# Altium PCB 48-17V Buck Converter.PcbDoc
Units mil, origin at the board's own origin, x right, y up, seen from the top; angles counter-clockwise.
Board outline 2099.53 x 1497.31 mil, 4 copper layers (TOP, GNG, GND, BOT), stack 64.961 mil thick; 34 components, 13 nets, 97 pads, 83 vias.
Unrouted connection lines stored in the file: 4.
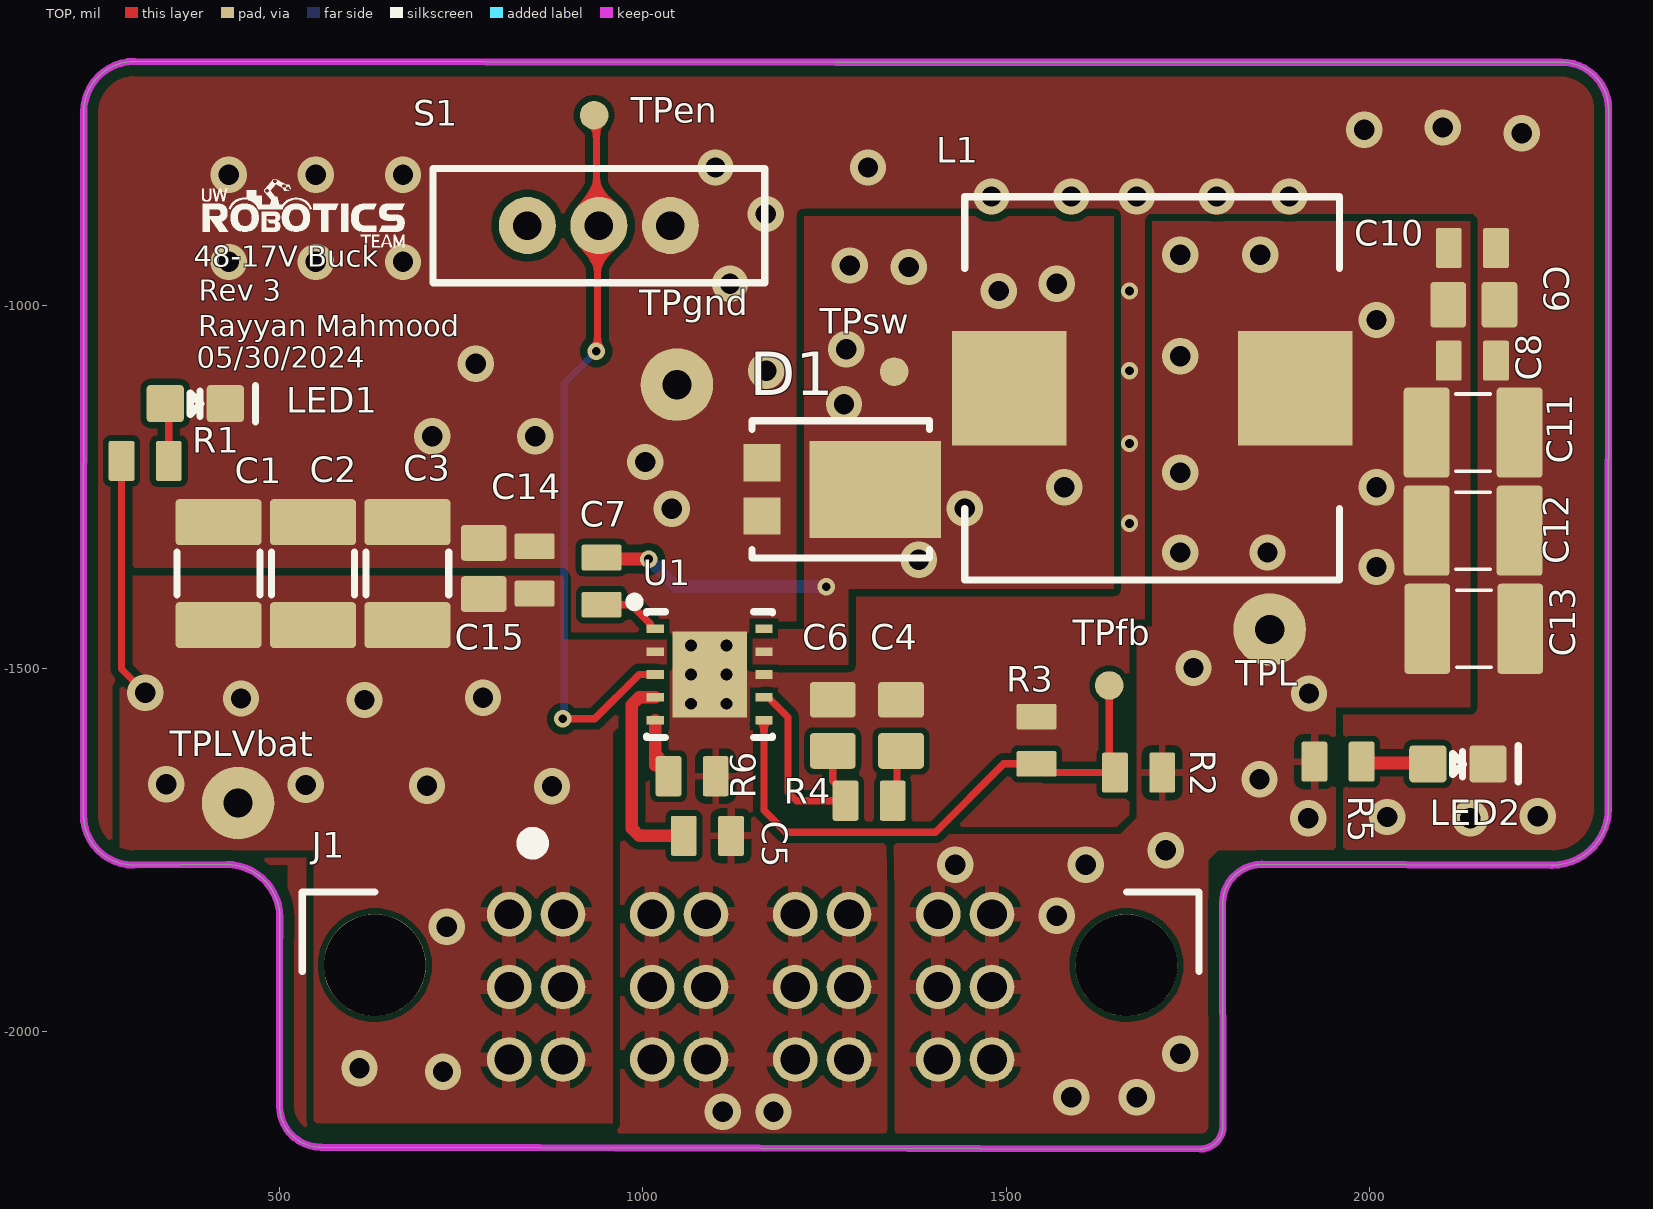
[diagram p0: TOP view]
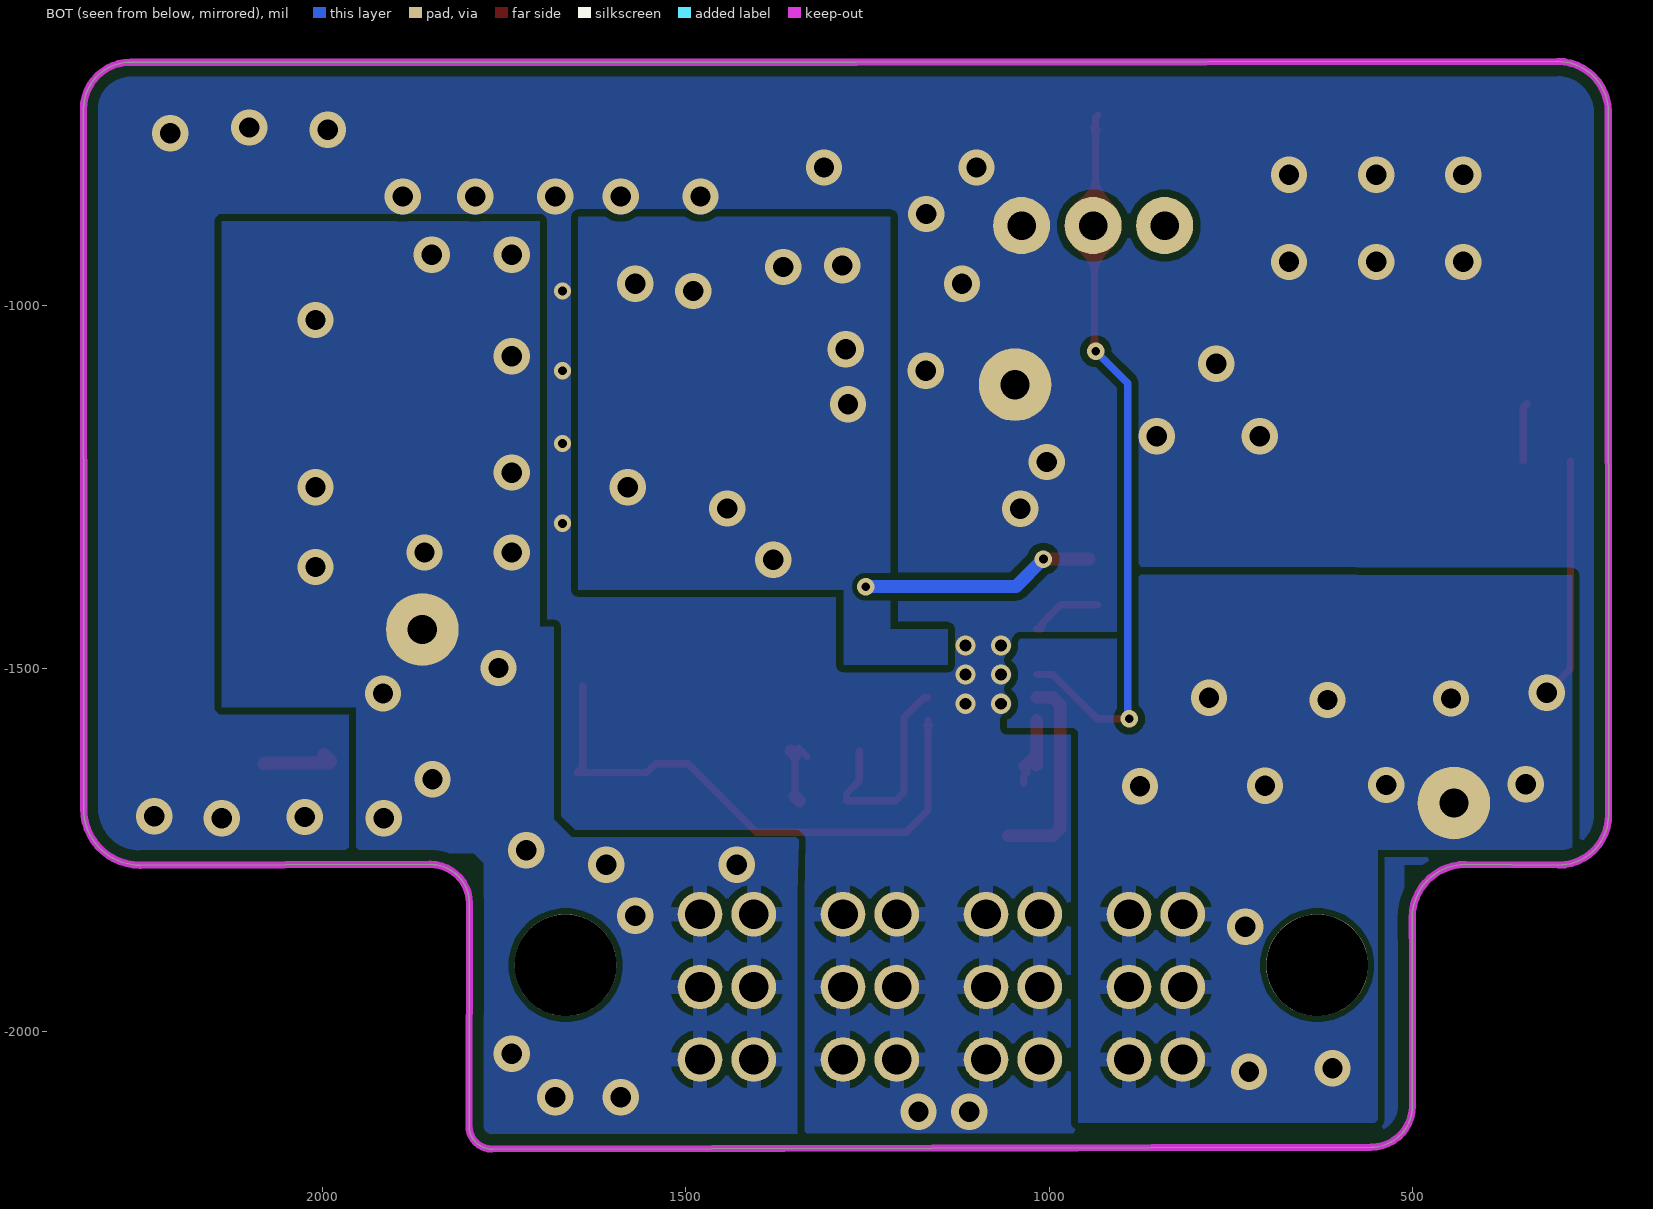
[diagram p1: BOT view, seen from below]
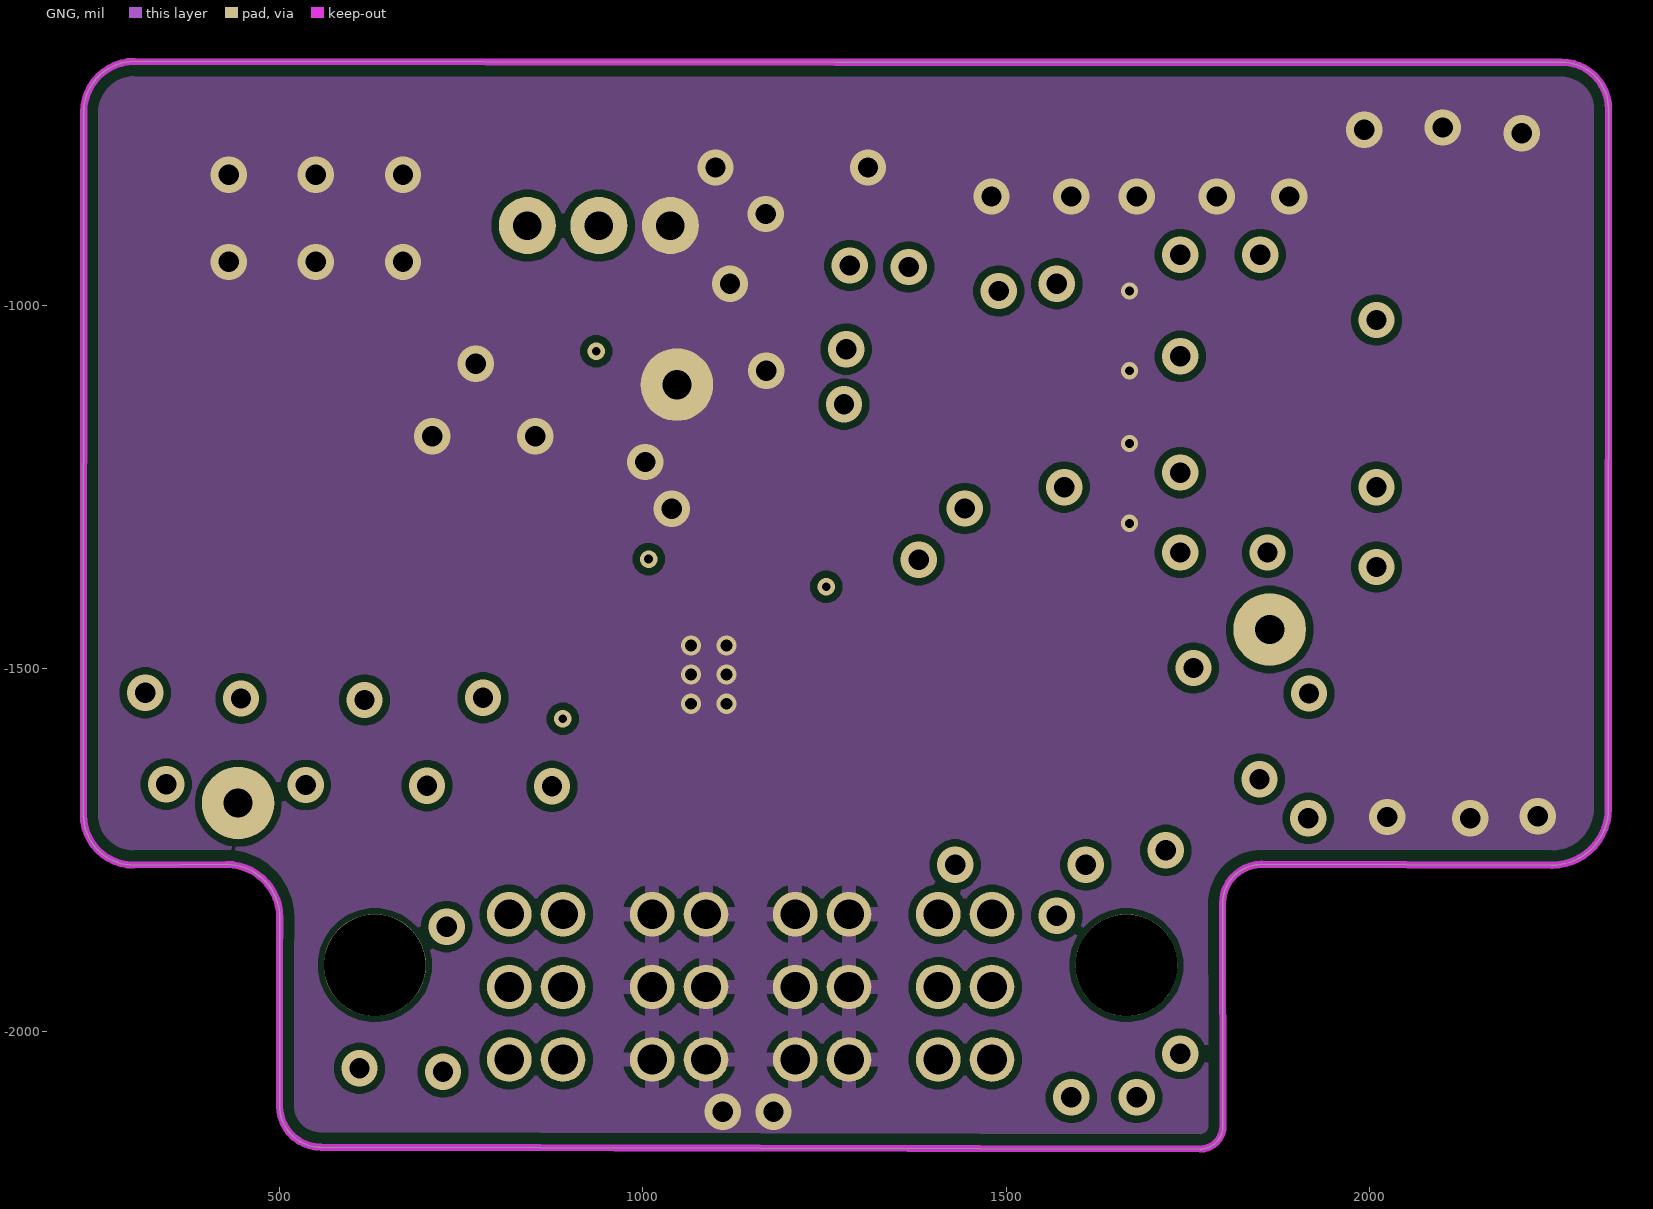
[diagram p2: GNG]
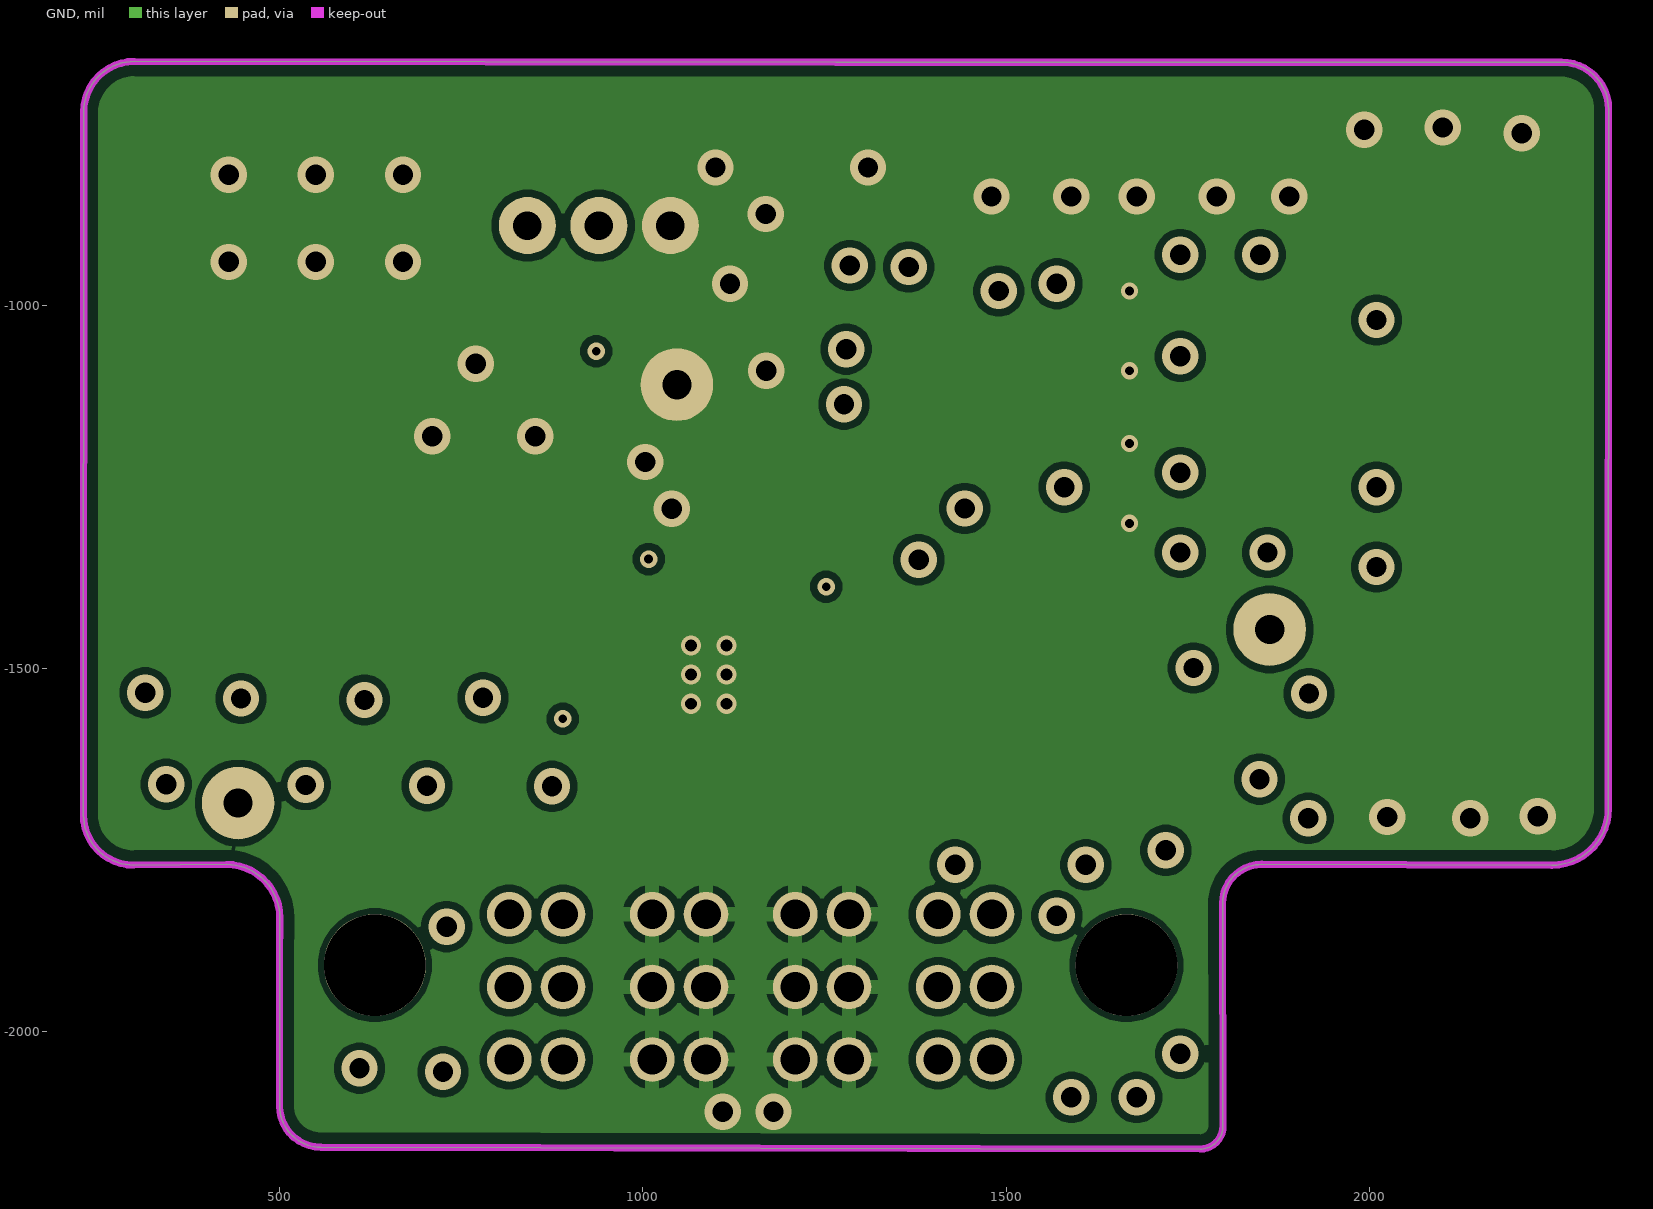
[diagram p3: GND]
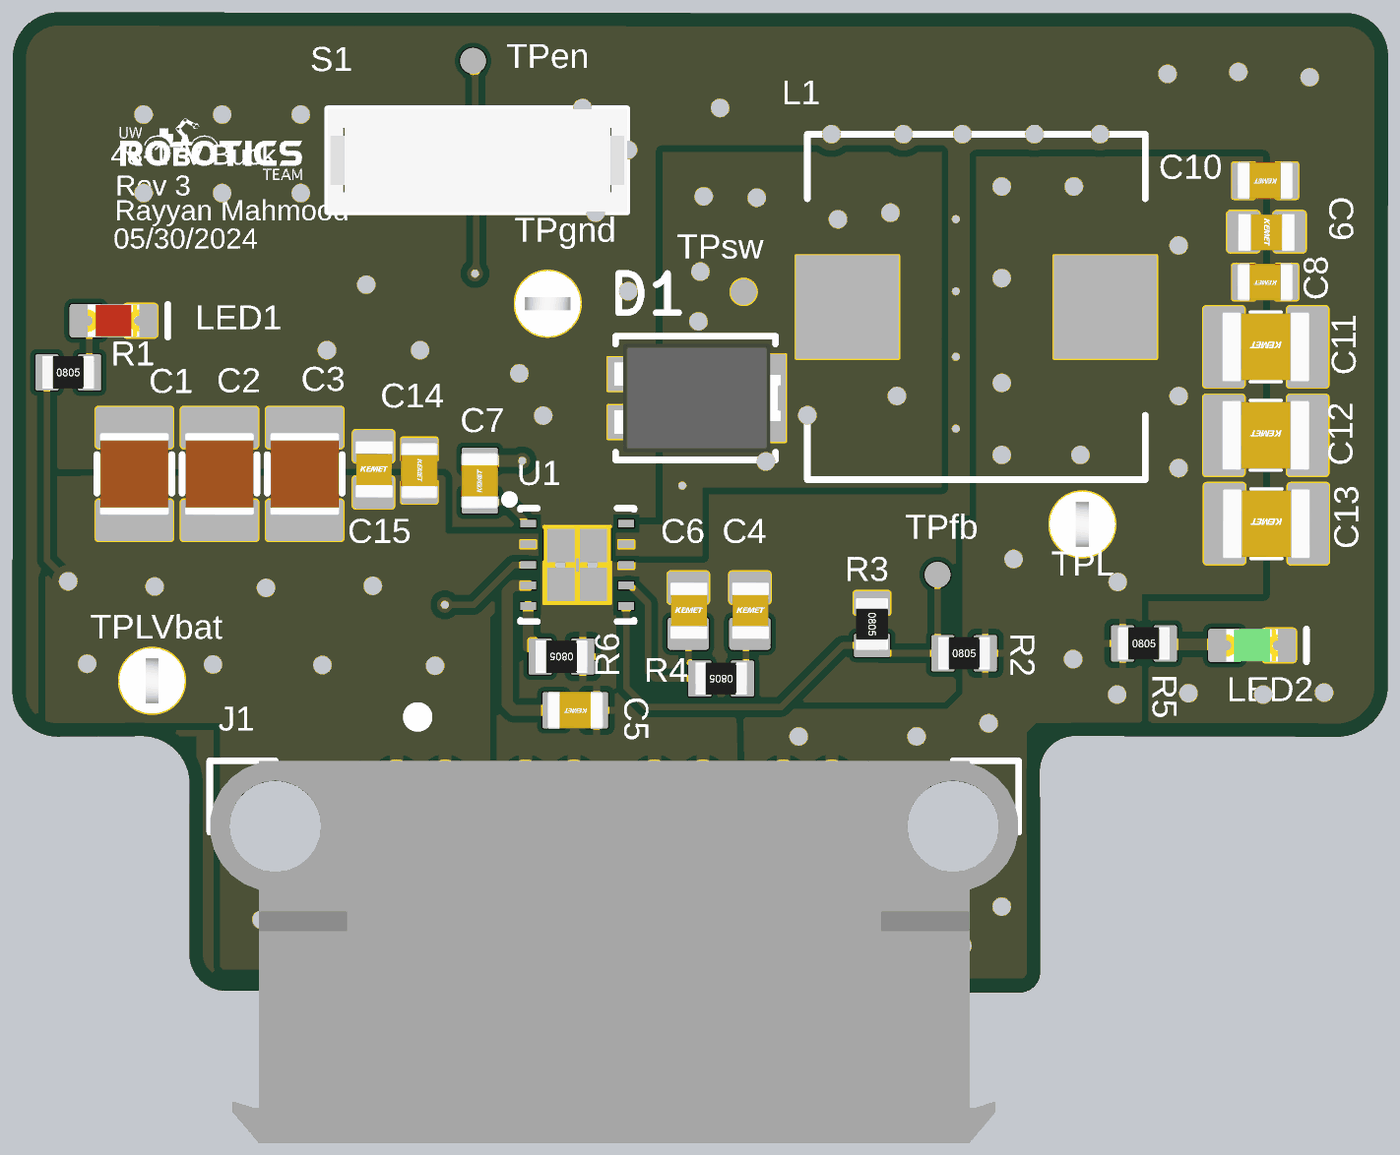
[diagram p4: 3D render of the assembled board from above, using the file's embedded part models]

## Layer stack, top to bottom
Top Solder: solder mask 0.5, Solder Resist, Dk 3.8
TOP: signal copper 2.953
Dielectric 1: prepreg 7.874, 7628, Dk 4.6
GNG: signal copper 0.689
Core: core 41.929, FR-4, Dk 4.5
GND: signal copper 0.689
Dielectric 2: prepreg 7.874, 7628, Dk 4.6
BOT: signal copper 2.953
Bottom Solder: solder mask 0.5, Solder Resist, Dk 3.8

## Board outline
500,-2101.78 499.99,-1902.13 500.37,-1842.77 ccw(c427.08,-1842.77) 427.08,-1769.47 299.13,-1770.32 cw(c299.13,-1701.17) 229.98,-1701.17 230.35,-733.79 cw(c300.16,-733.79) 300.16,-663.98 1265.75,-665 2264.61,-665 cw(c2264.61,-729.9) 2329.51,-729.9 2329.21,-1692.66 cw(c2251.4,-1692.66) 2251.4,-1770.48 1851.97,-1769.32 ccw(c1851.97,-1823.16) 1798.13,-1823.16 1798.7,-2129.43 cw(c1767.09,-2129.68) 1767.09,-2161.29 556.97,-2158.75 cw(c556.97,-2101.78)

## Design rules (kind name [scope] priority, off if disabled: settings)
BoardOutlineClearance [All] p1: gap=20 ignorepadtopadclearanceinfootprint=FALSE except(5: Text-OutlineEdge Text-CavityEdge Text-CutoutEdge Text-SplitBarrior Text-SplitContinuation; 25: Track-OutlineEdge Track-CavityEdge Track-CutoutEdge Track-SplitBarrior Track-SplitContinuation)
Clearance "High Voltage Internal" [InNetClass('High_Voltage_Internal')  and OnLayer('Power')] p1: gap=20 ignorepadtopadclearanceinfootprint=TRUE
Clearance "High Voltage External" [InNetClass('High_Voltage')  and OnLayer('Signal')] p2: gap=12 ignorepadtopadclearanceinfootprint=TRUE
Clearance Clearance_1 [All] p3: gap=10 ignorepadtopadclearanceinfootprint=TRUE except(0: Arc-Text Track-Text Text-Hole; 5: Track-Track SMDPad-SMDPad Text-Text; 7: SMDPad-Region; 8: Arc-Arc Arc-Track Arc-SMDPad Arc-Hole Track-SMDPad Track-Region Track-Hole SMDPad-THPad SMDPad-Fill SMDPad-Poly SMDPad-Text SMDPad-Hole THPad-Hole Via-Hole Fill-Hole Poly-Hole Region-Region Region-Hole; 20: THPad-THPad Via-Via)
ComponentClearance [All] p1: gap=10 collisioncheckmode=3 verticalgap=200 showdistances=FALSE
DiffPairsRouting [All] p1: maxlimit=10 minlimit=8 mostfreqgap=10 toplayer_minwidth=10 toplayer_maxwidth=10 toplayer_prefwidth=10 midlayer1_minwidth=10 midlayer1_maxwidth=10 midlayer1_prefwidth=10 midlayer2_minwidth=10 midlayer2_maxwidth=10 midlayer2_prefwidth=10 bottomlayer_minwidth=10 bottomlayer_maxwidth=10 bottomlayer_prefwidth=10 maxuncoupledlength=500
Height [All] p1: minheight=0 maxheight=50000 prefheight=500
HoleSize [All] p1: absolutevalues=TRUE maxlimit=200 minlimit=10 maxpercent=80.000 minpercent=20.000
HoleToHoleClearance [All] p1: gap=20 allowstackedmicrovias=TRUE
MinimumAnnularRing [All] p1: minimumring=5
MinimumSolderMaskSliver [All] p1: minsoldermaskwidth=3
PlaneConnect PlaneConnect_highpwr [(InNet('24V') OR InNet('VBAT'))] p1: planeconnectstyle=Direct reliefexpansion=20 reliefentries=4 reliefconductorwidth=10 reliefairgap=10
PlaneConnect PlaneConnect_GNDCON [(InNet('GND') AND (InComponent('J1') OR InComponent('J2')))] p2: planeconnectstyle=Direct reliefexpansion=20 reliefentries=4 reliefconductorwidth=10 reliefairgap=10
PlaneConnect [All] p3: pad.planeconnectstyle=Relief pad.reliefexpansion=20 pad.reliefentries=4 pad.reliefconductorwidth=10 pad.reliefairgap=10 via.planeconnectstyle=Direct via.reliefexpansion=20 via.reliefentries=4 via.reliefconductorwidth=10 via.reliefairgap=10
PolygonConnect PolygonConnect_DIRECT_COMPONENTS [(     InComponent('C1') OR     InComponent('C2') OR     InComponent('C3') OR     InComponent('C14') OR     InComponent('C15') OR     InComponent('C7') OR     (         InComponent('C10') OR         InComponent('C9') OR         InComponent('C11') OR         (             InComponent('C8') OR             InComponent('C12') OR             InComponent('C13') OR             InComponent('R4') OR             InComponent('C6') OR             InComponent('C4') OR             InComponent('R3')         )     ) )] p1: connectstyle=Direct reliefconductorwidth=10 reliefentries=4 polygonreliefangle="90 Angle" airgapwidth=10
PolygonConnect "Connector Relief" [InComponent('J1')] p2: connectstyle=Relief reliefconductorwidth=20 reliefentries=4 polygonreliefangle="90 Angle" airgapwidth=10
PolygonConnect PolygonConnect_Via [IsVia] p3: connectstyle=Direct reliefconductorwidth=10 reliefentries=4 polygonreliefangle="90 Angle" airgapwidth=10
PolygonConnect PolygonConnect_SMALL_Relief [(HasFootprint('CAP0805') OR HasFootprint('CAP0603') OR HasFootprint('RES0603') OR HasFootprint('RES0805') OR HasFootprint('CAP2012') OR HasFootprint('SOD-923') OR HasFootprint('SOD-128'))] p4: connectstyle=Relief reliefconductorwidth=10 reliefentries=4 polygonreliefangle="90 Angle" airgapwidth=10
PolygonConnect [All] p5: connectstyle=Direct reliefconductorwidth=10 reliefentries=4 polygonreliefangle="90 Angle" airgapwidth=10
RoutingVias [All] p1: holewidth=12 width=24 viastyle="Through Hole" minholewidth=6 minwidth=12 maxholewidth=24 maxwidth=50
SilkToSilkClearance [All] p1: silktosilkclearance=2
SilkToSolderMaskClearance [IsPad] p1: minsilkscreentomaskgap=0.5 clearancetoexposedcopper=TRUE
SolderMaskExpansion [All] p1: expansion=2 istentingtop=FALSE
SupplyNets "Schematic Supply Nets_2" [InNet('GND')] p1: voltage=0.000
SupplyNets "Schematic Supply Nets_1" [InNet('VBAT')] p2: voltage=0.000
SupplyNets "Schematic Supply Nets" [InNet('17V')] p3: voltage=0.000
Width Width_1 [All] p1: maxlimit=100 minlimit=5 preferedwidth=10 midlayer1_maxwidth=10 minimp=50.000000 maximp=50.000000 favimp=50.000000
21 further rules are at their usual default settings.

## Components (designator, comment, footprint, x,y, rotation, side; value= is the part's Value field where it differs from the comment)
C1 "CAP_2.2uF_100V_1210_1" CAPC3225X270N 416,-1369 r270 top value=2.2μF
C2 "CAP_2.2uF_100V_1210_1" CAPC3225X270N 546,-1369 r270 top value=2.2μF
C3 "CAP_2.2uF_100V_1210_1" CAPC3225X270N 676,-1369 r270 top value=2.2μF
C4 "CAP_22nF_50V_0805 +/- 1%" CAP2012 1355.53,-1577.87 r270 top value=22nF
C5 "CAP_2.7nF_50V_0805" CAP0805 1089,-1730 r180 top value=2.7nF
C6 "CAP_220pF_50V_0805_2_1" CAP2012 1261.53,-1577.87 r270 top value=220pF
C7 "CAP_100nF_50V_0805" CAP0805 943.28,-1379.41 r90 top value=100nF
C8 "CAP_0.1uF_100V_0805" CAP0805 2142,-1076 r180 top value=0.1µF
C9 "CAP_1uF_50V_0805" CAP2012 2144,-999 r180 top value=1μF
C10 "CAP_4.7uF_50V_0805" CAP0805 2142,-921 r180 top value=4.7μF
C11 "CAP_22uF_100V_1210" CAP1210 2143,-1175 r180 top value=22μF
C12 "CAP_22uF_100V_1210" CAP1210 2143,-1310 r180 top value=22μF
C13 "CAP_22uF_100V_1210" CAP1210 2144,-1445 r180 top value=22μF
C14 "CAP_0.1uF_100V_0805" CAP0805 851,-1364 r270 top value=0.1µF
C15 "CAP_1uF_50V_0805" CAP2012 781,-1362 r270 top value=1μF
D1 "8A" TO-277 1209.54,-1253.15 r270 top
J1 "CON_2POS_SCREW_TERM" MPT-04-01-01-L-RA-SD 1148.42,-2150.2 r0 top
L1 "IND_22uH_6.3A" IND_22uH_6.3A 1701.15,-1114 r0 top
LED1 "LED_RED" LED_0805_RED 384,-1135 r0 top
LED2 "LED_GREEN" LED_0805_GREEN 2122,-1631 r0 top
R1 "RES_6.04kΩ_0805_1%" RES0805 315,-1214 r0 top value=6.04kΩ
R2 "RES_243kΩ_0805_1%_1" RES0805 1682.48,-1643 r0 top value=243kΩ
R3 "RES_12kΩ_0805_1%" RES0805 1542,-1598.48 r270 top value=12kΩ
R4 "RES_9.76kΩ_0805_1%" RES0805 1311.63,-1681.73 r180 top value=9.76kΩ
R5 "RES_2KΩ_0805_1%" RES0805 1957,-1628 r0 top value=2kΩ
R6 "RES_205kΩ_0805_1%" RES0805 1068,-1648 r180 top value=205kΩ
S1 "SW_SLIDE_TOGGLE" SW_SLIDE_TOGGLE 939.57,-890 r180 top
TPen "TESTPOINT_1MM_CIRCLE" TESTPOINT_CIRCLE_1MM 933,-738 r90 top
TPfb "TESTPOINT_1MM_CIRCLE" TESTPOINT_CIRCLE_1MM 1642,-1523 r90 top
TPgnd "TESTPOINT_LOOP" TESTPOINT_LOOP 1047,-1109 r0 top
TPL "TESTPOINT_LOOP" TESTPOINT_LOOP 1863,-1446 r90 top
TPLVbat "TESTPOINT_LOOP" TESTPOINT_LOOP 443,-1685 r90 top (schematic designator TPLVBAT)
TPsw "TESTPOINT_1MM_CIRCLE" TESTPOINT_CIRCLE_1MM 1346,-1091 r90 top
U1 "TPS54561" BUCK_TPS54561DPRR 1092,-1508 r0 top locked

## Footprints (in the part's own frame and the unit in brackets; to place one, negate y for a bottom-side part, rotate by r counter-clockwise, add the part's x,y. Pads: shape width x height; smd on the part's side, far side on the other; paste and mask are expansions set on the pad)
BUCK_TPS54561DPRR [mm] "Buck Switching Regulator IC Positive Adjustable 0.8V 1 Output 5A 10-WDFN Exposed Pad"
  rect 0.6x0.3 smd: 1(-1.9,1.6) 2(-1.9,0.8) 3(-1.9,0) 4(-1.9,-0.8) 5(-1.9,-1.6) 6(1.9,-1.6) 7(1.9,-0.8) 8(1.9,0) 9(1.9,0.8) 10(1.9,1.6)
  rect 2.6x3 smd paste-1.245: 11(0,0)
  silkscreen extent -2.7,-2.2 2.2,2.61, body extent -2.05,-2.05 2.05,2.05, height 0.8
CAP0805 [mm] "Chip Capacitor, Body 2.0x1.2mm, Height 0.45mm, IPC Medium Density"
  rrect15% 0.9x1.4 smd: 1(-0.825,0) 2(0.825,0)
  body extent -1.1,-0.73 1.1,0.73, height 1.39
CAP1210 [mm]
  rrect15% 1.6x3.15 smd: 1(-1.625,0) 2(1.625,0)
  silkscreen extent -0.6,-1.35 0.6,1.35, body extent -1.7,-1.35 1.7,1.35, height 2.1
CAP2012 [mm]
  rrect20% 1.25x1.6 smd: 1(-0.895,0) 2(0.895,0)
  body extent -1.1,-0.7 1.1,0.75, height 1.41
CAPC3225X270N [mm]
  rrect15% 1.6x3 smd: 1(-1.8,0) 2(1.8,0)
  silkscreen extent -0.75,-1.45 0.75,1.45, body extent -1.6,-1.35 1.6,1.35, height 2.55
IND_22uH_6.3A [mm] "Precision Wire Wound Inductor, 2-Leads, Body 13.10x13.40mm, IPC Medium Density"
  rect 4x4 smd: 1(-5,0) 2(5,0)
  silkscreen extent -6.55,-6.7 6.55,6.7, body extent -6.55,-6.7 6.55,6.7, height 3.7
LED_0805_GREEN [mm] "SMD, 2-Leads, Body 2x1.25mm"
  rrect20% 1.3x1.3 smd: 1(-1.05,0) 2(1.05,0)
  silkscreen extent -0.18,-0.64 2.11,0.64, body extent -1,-0.62 1,0.63, height 1.12
LED_0805_RED [mm] "SMD, 2-Leads, Body 2x1.25mm"
  rrect20% 1.3x1.3 smd: 1(-1.05,0) 2(1.05,0)
  silkscreen extent -0.18,-0.64 2.11,0.64, body extent -1,-0.62 1,0.63, height 1.12
MPT-04-01-01-L-RA-SD [mm]
  round 1.56 hole 1.04 paste-2539.97: 1(-8.44,2.85) 1(-6.56,2.85) 2(-3.44,2.85) 2(-1.56,2.85) 3(1.56,2.85) 3(3.44,2.85) 4(6.56,2.85) 4(8.44,2.85)
  round 1.56 hole 1.04: 1(-8.44,5.39) 1(-8.44,7.93) 1(-6.56,5.39) 1(-6.56,7.93) 2(-3.44,5.39) 2(-3.44,7.93) 2(-1.56,5.39) 2(-1.56,7.93) 3(1.56,5.39) 3(1.56,7.93) 3(3.44,5.39) 4(6.56,5.39) 4(6.56,7.93) 4(8.44,5.39) 4(8.44,7.93)
  round 1.56 hole 1.04 mask+0.051: 3(3.44,7.93)
  round 3.56 hole 3.56 unplated: ""(-13.14,6.15) ""(13.14,6.15)
  silkscreen extent -15.68,5.94 15.68,10.67, body extent -15.68,-6.1 15.68,8.71, height 10.89
RES0805 [mm] "Chip Resistor, 2-Leads, Body 2.00x1.25mm, IPC High Density"
  rrect15% 0.9x1.4 smd: 1(-0.825,0) 2(0.825,0)
  body extent -1,-0.62 1,0.63, height 0.61
SW_SLIDE_TOGGLE [mm]
  round 2 hole 1: 1(-2.5,0) 2(0,0) 3(2.5,0)
  silkscreen extent -5.8,-2 5.8,2, body extent -5.8,-2 5.8,2, height 7
TESTPOINT_CIRCLE_1MM [mm]
  round 1 smd: 1(0,0)
TESTPOINT_LOOP [mm]
  round 2.54 hole 1.02: 1(0,0)
  body extent -1.27,-1.27 1.27,1.27, height 4.57
TO-277 [mm]
  rect 1.3x1.3 smd: 1(0.93,-1.15) 3(-0.93,-1.15)
  rect 3.4x4.6 smd: 2(0,2.8)
  silkscreen extent -2.4,-1.5 2.4,4.7, body extent -2.1,-1.55 2.1,4.9, height 1.2

## Part data
C1 C2 C3: "CAP CER 2.2UF 100V X7R 1210", Manufacturer 1="TDK Corporation", Manufacturer Part Number 1=C3225X7R2A225K230AB, Package/Footprint=1210, Supplier Part Number 1=445-4497-1-ND, Voltage Rating=100V, Mounting Type=SMD, Supplier 1=Digi-Key
C4: "CAP CER 22nF 50V 0805", Manufacturer 1="Murata Electronics", Manufacturer Part Number 1=GCM21B5C1H223FA16L, Package=0805, Supplier Part Number 1=490-GCM21B5C1H223FA16LCT-ND, Voltage Rating=50V, Mounting Type=SMD, Supplier 1=Digi-Key
C5: "CAP CER 2700PF 50V C0G 0805", Manufacturer 1="TDK Corporation", Manufacturer Part Number 1=C2012C0G1H272J060AA, Package/Footprint=0805, Supplier Part Number 1=445-7508-1-ND, Voltage Rating=50V, Supplier 1=Digi-Key
C6: "CAP CER 220pF 50V 0805 +/-1%", Manufacturer 1=YAGEO, Manufacturer Part Number 1=CC0805FRNPO9BN221, Package=0805, Supplier Part Number 1=311-4172-1-ND, Voltage Rating=50V, Mounting Type=SMD, Supplier 1=Digi-Key
C7: "CAP CER 0.1UF 50V X7R 0805", Manufacturer 1="Samsung Electro-Mechanics", Manufacturer Part Number 1=CL21B104KBCNNNC, Package/Footprint=0805, Supplier Part Number 1=1276-1003-1-ND, Voltage Rating=50V, Supplier 1=Digi-Key
C8 C14: "CAP CER 0.1UF 100V X7R 0805", Manufacturer 1="TDK Corporation", Manufacturer Part Number 1=C2012X7R2A104K125AA, Package=0805, Supplier Part Number 1=445-1418-1-ND, Voltage Rating=100V, Supplier 1=Digi-Key
C9 C15: "CAP CER 1UF 50V X7R 0805", LCSC Part #=C28323, Manufacturer 1="Samsung Electro-Mechanics", Manufacturer Part Number 1=CL21B105KBFNNNG, Package=0805, Supplier Part Number 1=1276-6470-1-ND, Voltage Rating=50V, Mounting Type=SMD, Supplier 1=Digi-Key
C10: "CAP CER 4.7UF 50V X5R 0805", Dielectric=X5R, LCSC Part #=C1779, Manufacturer 1="TDK Corporation", Manufacturer Part Number 1=CGA4J3X5R1H475K125AB, Package=0805, Supplier Part Number 1=445-7882-1-ND, Voltage Rating=50V, Mounting Type=SMD, Supplier 1=Digi-Key
C11 C12 C13: "CAP CER 22UF 35V X5R 1210", Manufacturer 1="Taiyo Yuden", Manufacturer Part Number 1=GMK325BJ226MM-T, Package/Footprint=1210, Supplier Part Number 1=587-6141-1-ND, Voltage Rating=35V, Mounting Type=SMD, Supplier 1=Digi-Key
D1: library part DIO_SCHOTTKY_100V_8A, "Diode 100 V 8A Surface Mount TO-277", Manufacturer 1=GSGC151BS, Manufacturer Part Number 1="Good-Ark Semiconductor", Package/Footprint=T0-277, Supplier Part Number 1=4786-GSGC151BSTR-ND, Mounting Type=SMD, Supplier 1=Digikey, Vr (Max)=100V
J1: library part CON_4POS_POWERBLADE_MALE, "CONN HDR 4POS 5MM R/A SLDR", Manufacturer 1="Samtec Inc.", Manufacturer Part Number 1=MPT-04-01-01-L-RA-SD, Package/Footprint="PowerStrip™ 30 MTS", Supplier Part Number 1=SAM9727-ND, Mounting Type=TH, Supplier 1=Digi-Key
L1: "FIXED IND 22UH 6.3A 25.7MOHM SMD", Current Rating=6.3A, DC Resistance (DCR)=22.27mR, Inductance=22μH, Inductance Tolerance=20%, Manufacturer 1="Eaton - Electronics Division", Manufacturer Part Number 1=HC9-220-R, Saturation Current=11A, Supplier Part Number 1=513-1349-1-ND, Mounting Type=SMD, Supplier 1=Digi-Key
LED1: "LED RED DIFFUSED 0805 SMD", Forward Voltage Drop=2V, Manufacturer 1=OSRAM, Manufacturer Part Number 1="LS R976-NR-1", Package/Footprint=0805, Supplier Part Number 1=475-1278-1-ND, Mounting Type=SMD, Supplier 1=Digi-Key
LED2: "LED GREEN DIFFUSED 0805 SMD", Forward Voltage Drop=2.2V, Manufacturer 1=OSRAM, Manufacturer Part Number 1="LG R971-KN-1", Package/Footprint=0805, Supplier Part Number 1=475-1410-1-ND, Mounting Type=SMD, Supplier 1=Digi-Key
R1: "RES 6.04K OHM 1% 1/8W 0805", Manufacturer 1=Yageo, Manufacturer Part Number 1=RC0805FR-076K04L, Package/Footprint=0805, Supplier Part Number 1=311-6.04KCRCT-ND, Mounting Type=SMD, Supplier 1=Digi-Key
R2: "RES 243K OHM 1% 1/8W 0805", Manufacturer 1=YAGEO, Manufacturer Part Number 1=RC0805FR-07243KL, Package/Footprint=0805, Supplier Part Number 1=311-243KCRCT-ND, Mounting Type=SMD, Supplier 1=Digi-Key
R3: "RES 12K OHM 1% 1/8W 0805", Manufacturer 1=YAGEO, Manufacturer Part Number 1=RC0805FR-0712KL, Package/Footprint=0805, Supplier Part Number 1=311-12.0KCRCT-ND, Mounting Type=SMD, Supplier 1=Digi-Key
R4: "RES 9.76K OHM 1% 1/8W 0805", Manufacturer 1=YAGEO, Manufacturer Part Number 1=RC0805FR-079K76L, Package/Footprint=0805, Supplier Part Number 1=311-9.76KCRCT-ND, Mounting Type=SMD, Supplier 1=Digi-Key
R5: "RES 2K OHM 1% 1/8W 0805", Manufacturer 1=YAGEO, Manufacturer Part Number 1=CRCW08052K20JNEAC, Package=0805, Supplier Part Number 1=13-RC0805FR-132KLCT-ND, Tolerance=1%, Supplier 1=Digi-Key
R6: "RES 205K OHM 1% 1/8W 0805", Manufacturer 1=YAGEO, Manufacturer Part Number 1=RC0805FR-07205KL, Package/Footprint=0805, Supplier Part Number 1=311-205KCRCT-ND, Mounting Type=SMD, Supplier 1=Digi-Key
S1: "SWITCH SLIDE SPDT 200MA 30V", Manufacturer 1=E-Switch, Manufacturer Part Number 1=100SP1T1B4M2QE, Package/Footprint=TH, Supplier Part Number 1=EG1903-ND, Voltage Rating (DC)=30V, Mounting Type=TH, Supplier 1=Digi-Key, Throw Configuration=SPDT
TPen TPfb TPsw: "TESTPOINT 1MM CIRCLE"
TPgnd TPL TPLVbat: "TESTPOINT THRUHOLE", Manufacturer 1="Keystone Electronics", Manufacturer Part Number 1=5002, Package/Footprint=TH, Supplier Part Number 1=36-5002-ND, Mounting Type=TH, Supplier 1=Digi-Key
U1: "Buck Switching Regulator IC Positive Adjustable 0.8V 1 Output 5A 10-WDFN Exposed Pad", Manufacturer 1="Texas Instruments", Manufacturer Part Number 1=TPS54561DPRR, Package/Footprint="10-WDFN Exposed Pad", Supplier Part Number 1=296-40803-1-ND, Mounting Type=SMD, Supplier 1=Digi-Key

## Via types
v1: diameter 50, hole 28, TOP to BOT, tented both sides, 69 vias
v2: diameter 24, hole 12, TOP to BOT, tented both sides, 8 vias
v3: diameter 28, hole 16, TOP to BOT, 6 vias

## Nets (pads, with @x,y where several pads share a name; then routed paths per layer and width w, separated by ;. In a path a pad name is that pad's centre, name@x,y a point inside that pad or via, vN(x,y) a via of type N, cw(c..) or ccw(c..) an arc to the next point about the centre after c; other vN are vias at no path point)
17V: C8.2 C9.2 C10.2 C11.2 C12.2 C13.2 J1.4 L1.2 R2.2 R5.1 TPL.1 | length 5.9
  TOP w10: v1@1605.8,-1765.8 v1(1610,-1770)
  other v1: 1590,-2090 1680,-2090 1740,-2030 1570,-1840 1430,-1770 1720,-1750 1916,-1706 1849,-1652 1917,-1534 1758,-1499 2010,-1360 1740,-1340 1860,-1340 2010,-1250 1740,-1230 1740,-1070 2010,-1020 1740,-930 1850,-930
GND: C1.1 C2.1 C3.1 C4.1 C5.1 C6.1 C8.1 C9.1 C10.1 C11.1 C12.1 C13.1 C14.1 C15.1 D1.1 D1.3 J1.2 J1.3 LED1.2 LED2.2 R3.1 R6.1 S1.1 TPgnd.1 U1.8 U1.11
  other v1: 1110,-2110 1180,-2110 2139,-1706 2025,-1704 2232,-1703 1040,-1280 1003.54,-1215.4 710,-1180 852,-1180 1170,-1090 770,-1080 1120,-970 430,-940 550,-940 670,-940 1169.47,-874.02 1480,-850 1590,-850 1680,-850 1790,-850 1890,-850 430,-820 550,-820 670,-820 1100,-810 1310,-810 2210,-763 1993,-758 2101,-755
  other v2: 1670,-1300 1670,-1190 1670,-1090 1670,-980
  other v3: 1066.41,-1548 1115.31,-1548 1066.41,-1508 1115.31,-1508 1066.41,-1468 1115.31,-1468
NetC4_2: C4.2 R4.1 | length 89.5
  TOP w10: C4.2@1333.48,-1620.8 C4.2@1344.9,-1609.38 ; R4.1@1349.82,-1676.02 C4.2@1349.82,-1618.81
  TOP w18: R4.1 R4.1@1349.82,-1676.02 ; C4.2@1349.82,-1618.81 C4.2
NetC5_2: C5.2 U1.4 | length 282.6
  TOP w17: U1.4 994.96,-1539.5 985,-1549.45 985,-1720.04 994.96,-1730 C5.2
NetC6_2: C6.2 R4.2 U1.7 | length 307.6
  TOP w10: U1.7 1172.71,-1539.5 1200,-1566.79 1200,-1670 1211.73,-1681.73 R4.2 1279.15,-1671.89 1261.53,-1654.26 C6.2
NetC7_1: C7.1 U1.1 | length 100.9
  TOP w10: C7.1@933.44,-1411.89 C7.1 984.08,-1411.89 1010.39,-1438.2 1010.39,-1444.1 1011.29,-1445.01 U1.1
NetC7_2: C7.2 D1.2 L1.1 TPsw.1 U1.9 | length 325.7
  TOP w10: C7.2 C7.2@945.35,-1349
  TOP w18: C7.2@945.35,-1349 v2(1008,-1349)
  BOT w18: v2(1008,-1349) 1046,-1387 v2(1252.38,-1387)
  other v1: 1380,-1350 1443.28,-1279.35 1580,-1250 1277,-1136 1280,-1060 1490,-980 1570,-970 1366,-947 1285,-945
NetLED1_1: LED1.1 R1.2 | length 82.1
  TOP w10: LED1.1@341.86,-1135.8 LED1.1 347.48,-1139.82 R1.2
NetLED2_1: LED2.1 R5.2 | length 106
  TOP w18: R5.2@1998.2,-1618 1989.48,-1626.72 R5.2 1990.98,-1629.5 2079.16,-1629.5 LED2.1
NetR2_1: R2.1 R3.2 TPfb.1 U1.6 | length 786.8
  TOP w10: U1.6 1166.8,-1694.95 1196.86,-1725 1403,-1725 1497.04,-1630.96 R3.2 1554.04,-1643 R2.1 1642,-1635 TPfb.1
NetR6_2: R6.2 U1.5 | length 97
  TOP w10: R6.2@1030.2,-1642.68 R6.2 R6.2@1035.52,-1657.84
  TOP w17: 1017.2,-1632.8 U1.5 ; R6.2@1021.2,-1621.8 R6.2@1033.79,-1634.4
NetS1_2: S1.2 TPen.1 U1.3 | length 1005.9
  TOP w10: v2(890,-1569) 934,-1569 995,-1508 U1.3 ; TPen.1 936.29,-741.29 936.29,-886.71 S1.2 937.79,-891.79 937.79,-1061.21 v2(936,-1063)
  BOT w10: v2@892,-1569 892,-1107 v2(936,-1063)
VBAT: C1.2 C2.2 C3.2 C14.2 C15.2 J1.1 R1.1 TPLVbat.1 U1.2 | length 332.5
  TOP w10: R1.1 282.52,-1500.52 v1(315,-1533)
  other v1: 725,-2055 610,-2050 730,-1855 875,-1662 703,-1661 536,-1660 344,-1659 617,-1543 447,-1541 780,-1540
pads on no net: J1. S1.3 U1.10

## Polygon pours and split planes (outlines as drawn)
GND on BOT "GND_L04_P047" (solid, pour order 47): 230.35,-665 2329.51,-665 2329.51,-1770 1798.72,-1770 1798.72,-2149.9 1789.42,-2159.2 511,-2159.2 511,-1770 230.35,-1770
NetC7_2 on BOT "NETC7_2_L04_P046" (solid, pour order 46): 1140,-1445.8 1218.65,-1445.8 1218.65,-878 1649,-878 1648,-879 1648,-1391 1283,-1391 1283,-1494.75 1140,-1494.75
VBAT on BOT "VBAT_L04_P044" (solid, pour order 44): 280,-1371.16 280,-1749 548,-1749 548,-2121 552,-2125 960,-2125 960,-1587 966,-1581 1058,-1581 1058,-1462 1055,-1459 894,-1459 892,-1457 892,-1370
17V on BOT "17V_L04_P045" (solid, pour order 45): 1347,-1811 1347,-2143 1348,-2144 1348.39,-2143.61 1778.33,-2143.61 1778.33,-1767.75 1792.07,-1754 1954,-1754 1954,-1553 2139,-1553 2139,-884 1701,-884 1701,-1442.39 1682,-1442.39 1682,-1707 1657,-1732 1345,-1732
GND on TOP "GND_L01_P043" (solid, pour order 43): 230.35,-665 2329.51,-665 2329.51,-1770 1798.72,-1770 1798.72,-2149.9 1789.42,-2159.2 511,-2159.2 511,-1770 230.35,-1770
NetC7_2 on TOP "NETC7_2_L01_P042" (solid, pour order 42): 1136,-1445.8 1222,-1445.8 1222,-877 1648,-877 1648,-1390 1283,-1390 1283,-1494.75 1136,-1494.75
17V on TOP "17V_L01_P041" (solid, pour order 41): 1347,-1807 1347,-2139 1348,-2140 1348.39,-2139.61 1778.33,-2139.61 1778.33,-1763.75 1792.07,-1750 1954,-1750 1954,-1553 2139,-1553 2139,-884 1701,-884 1701,-1442.39 1680,-1442.39 1680,-1705 1657,-1728 1345,-1728
VBAT on TOP "VBAT_L01_P040" (solid, pour order 40): 280,-1372.16 280,-1750 547,-1750 547,-2122 551,-2126 959,-2126 959,-1588 965,-1582 1057,-1582 1057,-1463 1054,-1460 893,-1460 891,-1458 891,-1371
GND on GNG "L2-GND" (solid, pour order 48): 500,-2101.78 499.99,-1902.13 500.37,-1842.77 ccw(c427.08,-1842.77) 427.08,-1769.47 299.13,-1770.32 cw(c299.13,-1701.17) 229.98,-1701.17 230.35,-733.79 cw(c300.16,-733.79) 300.16,-663.98 1265.75,-665 2264.61,-665 cw(c2264.61,-729.9) 2329.51,-729.9 2329.21,-1692.66 cw(c2251.4,-1692.66) 2251.4,-1770.48 1851.97,-1769.32 ccw(c1851.97,-1823.16) 1798.13,-1823.16 1798.7,-2129.43 cw(c1767.09,-2129.68) 1767.09,-2161.29 556.97,-2158.75 cw(c556.97,-2101.78)
GND on GND "L3-GND" (solid, pour order 49): 500,-2101.78 499.99,-1902.13 500.37,-1842.77 ccw(c427.08,-1842.77) 427.08,-1769.47 299.13,-1770.32 cw(c299.13,-1701.17) 229.98,-1701.17 230.35,-733.79 cw(c300.16,-733.79) 300.16,-663.98 1265.75,-665 2264.61,-665 cw(c2264.61,-729.9) 2329.51,-729.9 2329.21,-1692.66 cw(c2251.4,-1692.66) 2251.4,-1770.48 1851.97,-1769.32 ccw(c1851.97,-1823.16) 1798.13,-1823.16 1798.7,-2129.43 cw(c1767.09,-2129.68) 1767.09,-2161.29 556.97,-2158.75 cw(c556.97,-2101.78)

## Keep-outs
Keep-Out Layer:
  the board outline again, w10

## Silkscreen, mask and mechanical layers (free items; w line width, h text height)
Top Overlay:
  drawing of 16 lines, arcs and shapes, not listed
  text "48-17V Buck" at 382,-956 h50
  text "Rev 3" at 389,-1003 h50
  text "Rayyan Mahmood" at 388,-1052 h50
  text "05/30/2024" at 386,-1095 h50

## Text inside footprints (layer, text, board x,y; h text height)
J1: Mechanical 15 "CONN OVERHANG" at 748.42,-2249.57 h60